# Altium PCB Detection_Circuit_PCB.PcbDoc
Units mil, origin at the board's own origin, x right, y up, seen from the top; angles counter-clockwise.
Board outline 6000 x 2000 mil, 2 copper layers (TOP, BOTTOM), stack 54 mil thick; 173 components, 63 nets, 342 pads, 43 vias.
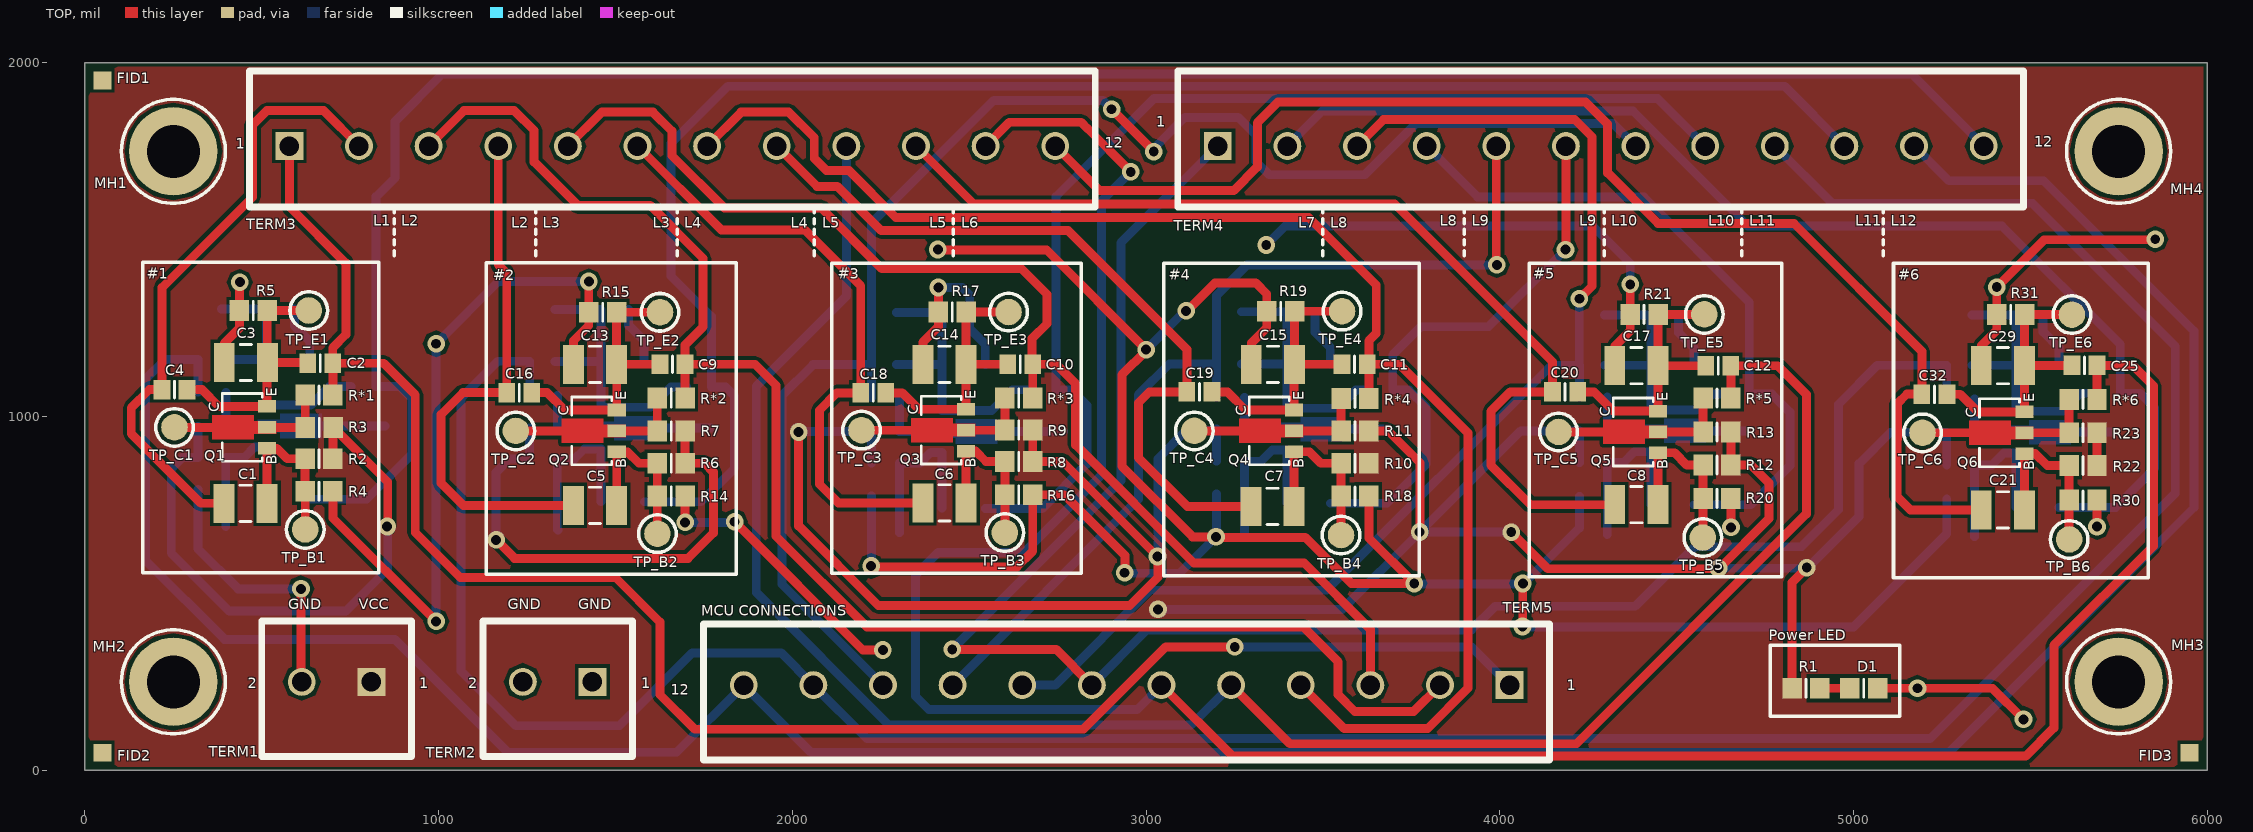
[diagram p0: TOP view]
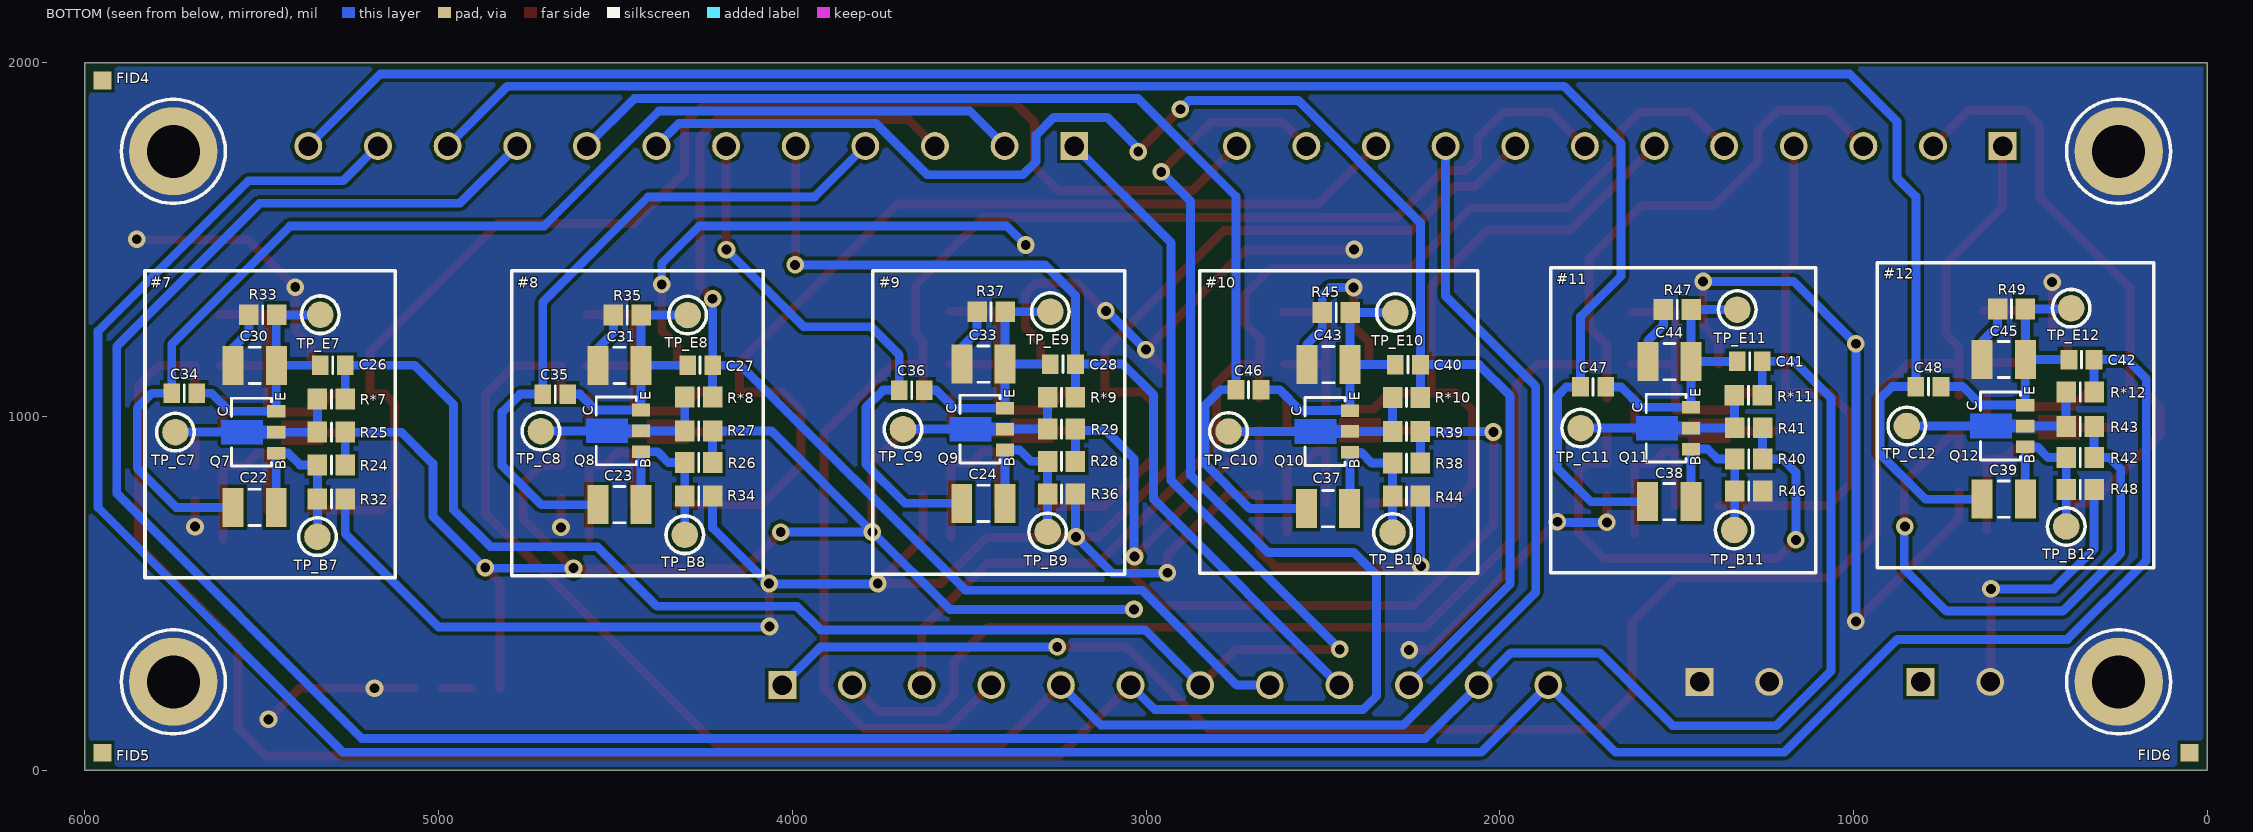
[diagram p1: BOTTOM view, seen from below]

## Layer stack, top to bottom
Top Solder: solder mask 4, Solder Resist, Dk 3.5
TOP: signal copper 20
Dielectric 1: dielectric 14, FR-4, Dk 4.8
BOTTOM: signal copper 20
Bottom Solder: solder mask 4, Solder Resist, Dk 3.5

## Board outline
0,0 6000,0 6000,2000 0,2000

## Design rules (kind name [scope] priority, off if disabled: settings)
BoardOutlineClearance [All] p1: gap=10
Clearance [All] p1: gap=10
HoleSize [All] p1: absolutevalues=TRUE maxlimit=500 minlimit=1 maxpercent=80.000 minpercent=20.000
MinimumSolderMaskSliver [All] p1: minsoldermaskwidth=2
PlaneConnect [All] p1: planeconnectstyle=Direct reliefexpansion=20 reliefentries=4 reliefconductorwidth=10 reliefairgap=10
PolygonConnect [All] p1: connectstyle=Direct reliefconductorwidth=10 reliefentries=4 polygonreliefangle="90 Angle" airgapwidth=10
RoutingVias VCC_Vias [InNet('VCC')] p1: holewidth=28 width=50 viastyle="Through Hole" minholewidth=28 minwidth=50 maxholewidth=28 maxwidth=50
RoutingVias GND_Vias [InNet('GND')] p2: holewidth=28 width=50 viastyle="Through Hole" minholewidth=28 minwidth=50 maxholewidth=28 maxwidth=50
RoutingVias Default_Vias [InNetClass('Default_Class')] p3: holewidth=28 width=50 viastyle="Through Hole" minholewidth=28 minwidth=50 maxholewidth=28 maxwidth=50
SilkToSilkClearance [All] p1: silktosilkclearance=2
SilkToSolderMaskClearance [IsPad] p1: minsilkscreentomaskgap=2 clearancetoexposedcopper=TRUE
SolderMaskExpansion [All] p1: expansion=4
Width VCC_Width [InNet('VCC')] p1: maxlimit=25 minlimit=25 preferedwidth=25
Width GND_Width [InNet('GND')] p2: maxlimit=25 minlimit=25 preferedwidth=25
Width Default_Width [InNetClass('Default_Class')] p3: maxlimit=25 minlimit=25 preferedwidth=25
25 further rules are at their usual default settings.

## Classes and differential pairs
component class Detection_Circuit_Sheet_01: C1 C2 C3 C4 D1 FID1 FID2 FID3 FID4 FID5 FID6 HEX_NUT1 MH1 MH2 MH3 MH4 Q1 R1 R2 R3 R4 R5 R*1 Screw1 StandOff1 StandOff2 StandOff3 StandOff4 TERM1 TERM2 TP_B1 TP_C1 TP_E1 Washer1 Washer2 Washer3 Washer4 Washer5 Washer6 Washer7 Washer8
component class Detection_Circuit_Sheet_02: C5 C6 C7 C8 C9 C10 C11 C12 C13 C14 C15 C16 C17 C18 C19 C20 C21 C22 C23 C24 C25 C26 C27 C28 C29 C30 C31 C32 C33 C34 C35 C36 C37 C38 C39 C40 C41 C42 C43 C44 C45 C46 C47 C48 Q2 Q3 Q4 Q5 Q6 Q7 Q8 Q9 Q10 Q11 Q12 R6 R7 R8 R9 R10 R11 R12 R13 R14 R15 R16 R17 R18 R19 R20 R21 R22 R23 R24 R25 R26 R27 R28 R29 R30 R31 R32 R33 R34 R35 R36 R37 R38 R39 R40 R41 R42 R43 R44 R45 R46 R47 R48 R49 R*2 R*3 R*4 R*5 R*6 R*7 R*8 R*9 R*10 R*11 R*12 TERM3 TERM4 TERM5 TP_B2 TP_B3 TP_B4 TP_B5 TP_B6 TP_B7 TP_B8 TP_B9 TP_B10 TP_B11 TP_B12 TP_C2 TP_C3 TP_C4 TP_C5 TP_C6 TP_C7 TP_C8 TP_C9 TP_C10 TP_C11 TP_C12 TP_E2 TP_E3 TP_E4 TP_E5 TP_E6 TP_E7 TP_E8 TP_E9 TP_E10 TP_E11 TP_E12
net class Default_Class: BASE_1 BASE_2 BASE_3 BASE_4 BASE_5 BASE_6 BASE_7 BASE_8 BASE_9 BASE_10 BASE_11 BASE_12 COLLECTOR_1 COLLECTOR_2 COLLECTOR_3 COLLECTOR_4 COLLECTOR_5 COLLECTOR_6 COLLECTOR_7 COLLECTOR_8 COLLECTOR_9 COLLECTOR_10 COLLECTOR_11 COLLECTOR_12 EMITTER_1 EMITTER_2 EMITTER_3 EMITTER_4 EMITTER_5 EMITTER_6 EMITTER_7 EMITTER_8 EMITTER_9 EMITTER_10 EMITTER_11 EMITTER_12 FEEDBACK_1 FEEDBACK_2 FEEDBACK_3 FEEDBACK_4 FEEDBACK_5 FEEDBACK_6 FEEDBACK_7 FEEDBACK_8 FEEDBACK_9 FEEDBACK_10 FEEDBACK_11 FEEDBACK_12 MCU_1 MCU_2 MCU_3 MCU_4 MCU_5 MCU_6 MCU_7 MCU_8 MCU_9 MCU_10 MCU_11 MCU_12 NetD1_1

## Components (designator, comment, footprint, x,y, rotation, side; value= is the part's Value field where it differs from the comment)
C1 "100UF" C1210_M 454,755 r0 top
C2 "08055C224JAT2A" 6-0805_N 665.34,1151 r0 top
C3 "100UF" C1210_M 455,1153 r0 top
C4 "08055C224JAT2A" 6-0805_N 253.28,1076.59 r0 top
C5 "100UF" C1210_M 1442.37,749 r0 top
C6 "100UF" C1210_M 2430.39,756 r0 top
C7 "100UF" C1210_M 3357.74,746 r0 top
C8 "100UF" C1210_M 4386.37,751 r0 top
C9 "08055C224JAT2A" 6-0805_N 1661.37,1148 r0 top
C10 "08055C224JAT2A" 6-0805_N 2644.39,1148 r0 top
C11 "08055C224JAT2A" 6-0805_N 3589.74,1148 r0 top
C12 "08055C224JAT2A" 6-0805_N 4617.8,1144 r0 top
C13 "100UF" C1210_M 1442.37,1148 r0 top
C14 "100UF" C1210_M 2430.39,1148 r0 top
C15 "100UF" C1210_M 3358.74,1148 r0 top
C16 "08055C224JAT2A" 6-0805_N 1228,1068 r0 top
C17 "100UF" C1210_M 4386.37,1144 r0 top
C18 "08055C224JAT2A" 6-0805_N 2229,1067 r0 top
C19 "08055C224JAT2A" 6-0805_N 3151,1070 r0 top
C20 "08055C224JAT2A" 6-0805_N 4185,1070 r0 top
C21 "100UF" C1210_M 5422.65,736.28 r0 top
C22 "100UF" C1210_M 5520.11,743.4 r180 bottom
C23 "100UF" C1210_M 4488.57,751 r180 bottom
C24 "100UF" C1210_M 3460,755 r180 bottom
C25 "08055C224JAT2A" 6-0805_N 5653.37,1144.69 r0 top
C26 "08055C224JAT2A" 6-0805_N 5299.11,1145 r180 bottom
C27 "08055C224JAT2A" 6-0805_N 4260.57,1145.38 r180 bottom
C28 "08055C224JAT2A" 6-0805_N 3235,1148.6 r180 bottom
C29 "100UF" C1210_M 5422.65,1144.28 r0 top
C30 "100UF" C1210_M 5519.83,1145 r180 bottom
C31 "100UF" C1210_M 4488.57,1145 r180 bottom
C32 "08055C224JAT2A" 6-0805_N 5229,1063 r0 top
C33 "100UF" C1210_M 3459.72,1148.6 r180 bottom
C34 "08055C224JAT2A" 6-0805_N 5719,1066 r180 bottom
C35 "08055C224JAT2A" 6-0805_N 4670.28,1063.6 r180 bottom
C36 "08055C224JAT2A" 6-0805_N 3662,1075 r180 bottom
C37 "100UF" C1210_M 2485.31,740 r180 bottom
C38 "100UF" C1210_M 1520.57,759.4 r180 bottom
C39 "100UF" C1210_M 574.88,766.4 r180 bottom
C40 "08055C224JAT2A" 6-0805_N 2259.6,1147 r180 bottom
C41 "08055C224JAT2A" 6-0805_N 1292.88,1156.4 r180 bottom
C42 "08055C224JAT2A" 6-0805_N 354.88,1161.4 r180 bottom
C43 "100UF" C1210_M 2484.31,1147 r180 bottom
C44 "100UF" C1210_M 1519.88,1155.4 r180 bottom
C45 "100UF" C1210_M 574.88,1161.4 r180 bottom
C46 "08055C224JAT2A" 6-0805_N 2710,1076 r180 bottom
C47 "08055C224JAT2A" 6-0805_N 1736,1084 r180 bottom
C48 "08055C224JAT2A" 6-0805_N 788,1085 r180 bottom
D1 "LTST-C171GKT" 6-0805_M 5029,232 r0 top
FID1 "Fiducial" Fiducial#1 52,1951 r90 top
FID2 "Fiducial" Fiducial#2 -246,158 r90 top
FID3 "Fiducial" Fiducial#3 5953,55 r90 top
FID4 "Fiducial" Fiducial#4 5948,1950 r90 bottom
FID5 "Fiducial" Fiducial#5 5969,99 r90 bottom
FID6 "Fiducial" Fiducial#6 -110,51 r90 bottom
MH1 "#6 MH" #6_MH 250,1750 r0 top locked
MH2 "#6 MH" #6_MH 250,250 r0 top locked
MH3 "#6 MH" #6_MH 5750,250 r0 top locked
MH4 "#6 MH" #6_MH 5750,1750 r0 top locked
Q1 "DXT3904" DXT3904-13 445.28,969.6 r90 top
Q2 "DXT3904" DXT3904-13 1433.65,959.6 r90 top
Q3 "DXT3904" DXT3904-13 2421.68,961.6 r90 top
Q4 "DXT3904" DXT3904-13 3349.02,959.6 r90 top
Q5 "DXT3904" DXT3904-13 4377.96,956.69 r90 top
Q6 "DXT3904" DXT3904-13 5413.65,954.28 r90 top
Q7 "DXT3904" DXT3904-13 5528.83,956 r90 bottom
Q8 "DXT3904" DXT3904-13 4497.28,959.6 r90 bottom
Q9 "DXT3904" DXT3904-13 3468.72,964.6 r90 bottom
Q10 "DXT3904" DXT3904-13 2493.31,958 r90 bottom
Q11 "DXT3904" DXT3904-13 1528.88,967.4 r90 bottom
Q12 "DXT3904" DXT3904-13 583.88,973.4 r90 bottom
R1 "1K" 6-0805_M 4866,232 r180 top
R2 "39K" 6-0805_M 662,881 r0 top
R3 "2.2K" 6-0805_M 662.28,969.54 r0 top
R4 "10K" 6-0805_M 662,789 r180 top
R5 "470" 6-0805_M 476,1300 r0 top
R6 "39K" 6-0805_M 1657.65,868 r0 top
R7 "2.2K" 6-0805_M 1657.65,959.54 r0 top
R8 "39K" 6-0805_M 2640.39,873 r0 top
R9 "2.2K" 6-0805_M 2640.39,961.6 r0 top
R10 "39K" 6-0805_M 3590.74,868 r0 top
R11 "2.2K" 6-0805_M 3590.74,959.6 r0 top
R12 "39K" 6-0805_M 4614.37,863 r0 top
R13 "2.2K" 6-0805_M 4614.37,956.64 r0 top
R14 "10K" 6-0805_M 1657.65,776 r180 top
R15 "470" 6-0805_M 1464.02,1295 r0 top
R16 "10K" 6-0805_M 2640.39,779 r180 top
R17 "470" 6-0805_M 2452.39,1296 r0 top
R18 "10K" 6-0805_M 3590.74,775 r180 top
R19 "470" 6-0805_M 3380.72,1298 r0 top
R20 "10K" 6-0805_M 4614.37,769 r180 top
R21 "470" 6-0805_M 4408.37,1289 r0 top
R22 "39K" 6-0805_M 5649.37,861.69 r0 top
R23 "2.2K" 6-0805_M 5649.37,954.23 r0 top
R24 "39K" 6-0805_M 5303.11,863.4 r180 bottom
R25 "2.2K" 6-0805_M 5303.11,955.94 r180 bottom
R26 "39K" 6-0805_M 4264.57,870 r180 bottom
R27 "2.2K" 6-0805_M 4264.57,959.54 r180 bottom
R28 "39K" 6-0805_M 3238.72,873.6 r180 bottom
R29 "2.2K" 6-0805_M 3238.72,964.54 r180 bottom
R30 "10K" 6-0805_M 5649.37,763.69 r180 top
R31 "470" 6-0805_M 5444.65,1288.28 r0 top
R32 "10K" 6-0805_M 5303.11,767.4 r0 bottom
R33 "470" 6-0805_M 5497.13,1288 r180 bottom
R34 "10K" 6-0805_M 4264.57,775 r0 bottom
R35 "470" 6-0805_M 4466.57,1287 r180 bottom
R36 "10K" 6-0805_M 3239,781 r0 bottom
R37 "470" 6-0805_M 3438,1296.6 r180 bottom
R38 "39K" 6-0805_M 2263.6,868.4 r180 bottom
R39 "2.2K" 6-0805_M 2263.6,958 r180 bottom
R40 "39K" 6-0805_M 1296,880 r180 bottom
R41 "2.2K" 6-0805_M 1295.88,968.4 r180 bottom
R42 "39K" 6-0805_M 358.88,884.4 r180 bottom
R43 "2.2K" 6-0805_M 358.88,972.5 r180 bottom
R44 "10K" 6-0805_M 2263.6,775.4 r0 bottom
R45 "470" 6-0805_M 2462.31,1294 r180 bottom
R46 "10K" 6-0805_M 1296,790 r0 bottom
R47 "470" 6-0805_M 1497.88,1302.4 r180 bottom
R48 "10K" 6-0805_M 358.88,794.4 r0 bottom
R49 "470" 6-0805_M 552.88,1304.59 r180 bottom
R*1 "0" 6-0805_M 662,1061 r0 top
R*2 "0" 6-0805_M 1657.65,1053 r0 top
R*3 "0" 6-0805_M 2640.39,1053 r0 top
R*4 "0" 6-0805_M 3590.74,1051 r0 top
R*5 "0" 6-0805_M 4614.37,1052.69 r0 top
R*6 "0" 6-0805_M 5649.37,1048.69 r0 top
R*7 "0" 6-0805_M 5303.11,1049.4 r180 bottom
R*8 "0" 6-0805_M 4264.57,1055 r180 bottom
R*9 "0" 6-0805_M 3238.72,1054.6 r180 bottom
R*10 "0" 6-0805_M 2263.6,1054.4 r180 bottom
R*11 "0" 6-0805_M 1296.88,1060.4 r180 bottom
R*12 "0" 6-0805_M 358.88,1069.4 r180 bottom
TERM1 "1935161" 1935161 810,250 r0 top
TERM2 "1935161" 1935161 1435,250 r0 top
TERM3 "1935268" 1935268 578,1765 r180 top locked
TERM4 "1935268" 1935268 3203,1765 r180 top locked
TERM5 "1935268" 1935268 4028,241 r0 top locked
TP_B1 "TestPoint" TestPoint 623,681 r90 top
TP_B2 "TestPoint" TestPoint 1618.68,669 r90 top
TP_B3 "TestPoint" TestPoint 2601.02,672 r90 top
TP_B4 "TestPoint" TestPoint 3551.37,665 r90 top
TP_B5 "TestPoint" TestPoint 4574.37,658 r90 top
TP_B6 "TestPoint" TestPoint 5610,652.69 r90 top
TP_B7 "TestPoint" TestPoint 5342.48,660.4 r90 bottom
TP_B8 "TestPoint" TestPoint 4303.94,666 r90 bottom
TP_B9 "TestPoint" TestPoint 3278.09,674 r90 bottom
TP_B10 "TestPoint" TestPoint 2302.88,672.4 r90 bottom
TP_B11 "TestPoint" TestPoint 1337.25,679.4 r90 bottom
TP_B12 "TestPoint" TestPoint 398.25,689.4 r90 bottom
TP_C1 "TestPoint" TestPoint 253.28,969.6 r90 top
TP_C2 "TestPoint" TestPoint 1218.37,959.54 r90 top
TP_C3 "TestPoint" TestPoint 2195.68,961.6 r90 top
TP_C4 "TestPoint" TestPoint 3136.74,959.6 r90 top
TP_C5 "TestPoint" TestPoint 4166.37,956.64 r90 top
TP_C6 "TestPoint" TestPoint 5195.37,954.23 r90 top
TP_C7 "TestPoint" TestPoint 5744.11,956 r90 bottom
TP_C8 "TestPoint" TestPoint 4710.57,959 r90 bottom
TP_C9 "TestPoint" TestPoint 3687,964.54 r90 bottom
TP_C10 "TestPoint" TestPoint 2766.6,958 r90 bottom
TP_C11 "TestPoint" TestPoint 1770.88,967.4 r90 bottom
TP_C12 "TestPoint" TestPoint 848.88,973.4 r90 bottom
TP_E1 "TestPoint" TestPoint 633,1300 r90 top
TP_E2 "TestPoint" TestPoint 1625.94,1295 r90 top
TP_E3 "TestPoint" TestPoint 2611.39,1295.6 r90 top
TP_E4 "TestPoint" TestPoint 3554.31,1298 r90 top
TP_E5 "TestPoint" TestPoint 4578.71,1289 r90 top
TP_E6 "TestPoint" TestPoint 5617.94,1288.28 r90 top
TP_E7 "TestPoint" TestPoint 5334.54,1288 r90 bottom
TP_E8 "TestPoint" TestPoint 4296,1287 r90 bottom
TP_E9 "TestPoint" TestPoint 3270.43,1296.6 r90 bottom
TP_E10 "TestPoint" TestPoint 2295.03,1294 r90 bottom
TP_E11 "TestPoint" TestPoint 1328.31,1302.4 r90 bottom
TP_E12 "TestPoint" TestPoint 384.31,1306.4 r90 bottom

## Footprints (in the part's own frame and the unit in brackets; to place one, negate y for a bottom-side part, rotate by r counter-clockwise, add the part's x,y. Pads: shape width x height; smd on the part's side, far side on the other; paste and mask are expansions set on the pad)
6-0805_M [mm] "Chip Resistor, Body 2.0x1.2mm, IPC Low Density"
  rect 1.4x1.5 smd: 1(-1,0) 2(1,0)
  silkscreen extent 0,-0.65 0,0.65, body extent -1.07,-0.7 1.07,0.7, height 0.7
6-0805_N [mm] "Chip Resistor, Body 2.0x1.2mm, IPC Medium Density"
  rect 1.2x1.4 smd: 1(-0.9,0) 2(0.9,0)
  silkscreen extent 0,-0.6 0,0.6, body extent -1.07,-0.7 1.07,0.7, height 0.7
1935161 [mm] "TERM BLOCK PCB 2POS 5.0MM GREEN"
  rect 2x2 hole 1.4: 1(0,0)
  round 2 hole 1.4: 2(-5,0)
  silkscreen extent -7.88,-5.38 2.88,4.38, body extent -7.5,-5 2.5,4, height 11.4
1935268 [mm] "TERM BLOCK PCB 12POS 5.0MM GREEN"
  rect 2x2 hole 1.4: 1(0,0)
  round 2 hole 1.4: 2(-5,0) 3(-10,0) 4(-15,0) 5(-20,0) 6(-25,0) 7(-30,0) 8(-35,0) 9(-40,0) 10(-45,0) 11(-50,0) 12(-55,0)
  silkscreen extent -57.87,-5.38 2.88,4.38, body extent -57.5,-5 2.5,4, height 11.4
#6_MH [mil] "#6 Mounting Hole w/ 6-32 Hex Stand Off Clearance"
  round 250 hole 150: MH(0,0)
  silkscreen extent -147,-147 147,147
C1210_M [mm] "Chip Capacitor, Body 3.2x2.5mm, IPC Low Density"
  rect 1.5x2.8 smd: 1(-1.55,0) 2(1.55,0)
  silkscreen extent -0.4,-1.3 0.4,1.3, body extent -1.7,-1.35 1.7,1.35, height 1.5
DXT3904-13 [mm] "TRANS NPN 40V 0.2A SOT89-3"
  rect 0.9x1.3 smd: 1(-0.001,-1.775) 2(-1.5,-1.775) 3(1.5,-1.775)
  TOP region: -0.866,-0.805 -0.45,-0.805 -0.45,-2.425 0.45,-2.425 0.45,-0.805 0.866,-0.805 0.866,2.175 -0.866,2.175
  silkscreen extent -2.44,-1.42 2.44,1.45, body extent -2.3,-1.3 2.3,1.3, height 1.6
Fiducial#1 [mil] "25 MIL FIDUCIAL"
  rect 50x50 smd mask+0: 1(-1,2)
Fiducial#2 [mil] "25 MIL FIDUCIAL"
  rect 50x50 smd mask+0: 1(-108,-296)
Fiducial#3 [mil] "25 MIL FIDUCIAL"
  rect 50x50 smd mask+0: 1(-5,3)
Fiducial#4 [mil] "25 MIL FIDUCIAL"
  rect 50x50 smd mask+0: 1(0,2)
Fiducial#5 [mil] "25 MIL FIDUCIAL"
  rect 50x50 smd mask+0: 1(-49,-19)
Fiducial#6 [mil] "25 MIL FIDUCIAL"
  rect 50x50 smd mask+0: 1(-1,160)
TestPoint [mil] "TestPoint"
  round 75 smd mask+10: 1(0,0)
  silkscreen extent -53,-53 53,53

## Part data
C1 C3 C5 C6 C7 C8 C13 C14 C15 C17 C21 C22 C23 C24 C29 C30 C31 C33 C37 C38 C39 C43 C44 C45: library part CC1210MKX5R7BB107, "CAP CER 100UF 16V X5R 1210"
C2 C4 C9 C10 C11 C12 C16 C18 C19 C20 C25 C26 C27 C28 C32 C34 C35 C36 C40 C41 C42 C46 C47 C48: "CAP CER 0.22UF 50V X7R 0805"
D1: library part LED3, "LED GREEN CLEAR 0805 SMD"
MH1 MH2 MH3 MH4: library part MH, "#6 Mounting Hole"
Q1 Q2 Q3 Q4 Q5 Q6 Q7 Q8 Q9 Q10 Q11 Q12: library part DXT3904-13, "TRANS NPN 40V 0.2A SOT89-3"
R1: library part RNCP0805FTD1K00, "RES SMD 1K OHM 1% 1/4W 0805"
R2 R6 R8 R10 R12 R22 R24 R26 R28 R38 R40 R42: library part ERJ-PB6D3902V, "RES SMD 39K OHM 0.5% 1/4W 0805"
R3 R7 R9 R11 R13 R23 R25 R27 R29 R39 R41 R43: library part ERJ-PB6D2201V, "RES SMD 2.2K OHM 0.5% 1/4W 0805"
R4 R14 R16 R18 R20 R30 R32 R34 R36 R44 R46 R48: library part RNCP0805FTD10K0, "RES SMD 10K OHM 1% 1/4W 0805"
R5 R15 R17 R19 R21 R31 R33 R35 R37 R45 R47 R49: library part ERJ-PB6D4700V, "RES SMD 470 OHM 0.5% 1/4W 0805"
R*1 R*2 R*3 R*4 R*5 R*6 R*7 R*8 R*9 R*10 R*11 R*12: library part ERJ-6GEY0R00V, "RES SMD 0 OHM JUMPER 1/8W 0805"
TERM1 TERM2: "TERM BLOCK PCB 2POS 5.0MM GREEN"
TERM3 TERM4 TERM5: "TERM BLOCK PCB 12POS 5.0MM GREEN"
TP_B1 TP_B2 TP_B3 TP_B4 TP_B5 TP_B6 TP_B7 TP_B8 TP_B9 TP_B10 TP_B11 TP_B12 TP_C1 TP_C2 TP_C3 TP_C4 TP_C5 TP_C6 TP_C7 TP_C8 TP_C9 TP_C10 TP_C11 TP_C12 TP_E1 TP_E2 TP_E3 TP_E4 TP_E5 TP_E6 TP_E7 TP_E8 TP_E9 TP_E10 TP_E11 TP_E12: "Test Point"

## Via types
v1: diameter 50, hole 28, TOP to BOTTOM, 43 vias

## Nets (pads, with @x,y where several pads share a name; then routed paths per layer and width w, separated by ;. In a path a pad name is that pad's centre, name@x,y a point inside that pad or via, vN(x,y) a via of type N, cw(c..) or ccw(c..) an arc to the next point about the centre after c; other vN are vias at no path point)
BASE_1: C1.2 Q1.2 R2.1 R4.2 TP_B1.1 | length 474.7
  TOP w25: C1.2@515.17,755.14 Q1.2 542.46,910.54 572,881 R2.1 R4.2 ; TP_B1.1 R4.2@623,788.63
BASE_2: C5.2 Q2.2 R6.1 R14.2 TP_B2.1 | length 478.2
  TOP w25: C5.2@1503.54,749.14 Q2.2 1533.91,900.54 1566.45,868 R6.1 R14.2 TP_B2.1@1618.28,669.39
BASE_3: C6.2 Q3.2 R8.1 R16.2 TP_B3.1 | length 469.1
  TOP w25: C6.2@2491.56,756.14 Q3.2 2518.15,902.54 2547.69,873 R8.1 R16.2 TP_B3.1
BASE_4: C7.2 Q4.2 R10.1 R18.2 TP_B4.1 | length 508.3
  TOP w25: C7.2@3418.91,746.14 Q4.2 3461.96,900.54 3494.5,868 R10.1 R18.2 TP_B4.1 TP_B4.1@3551.37,660.06
BASE_5: C8.2 Q5.2 R12.1 R20.2 TP_B5.1 | length 492.1
  TOP w25: C8.2@4447.84,751.45 Q5.2 4494.36,897.64 4529,863 R12.1 R20.2 TP_B5.1@4575,658.63
BASE_6: C21.2 Q6.2 R22.1 R30.2 TP_B6.1 | length 508.2
  TOP w25: C21.2@5483.54,736.43 Q6.2 5514.37,895.23 5547.91,861.69 R22.1 R30.2 TP_B6.1
BASE_7: C22.2 Q7.2 R24.1 R32.2 TP_B7.1 | length 486.8
  BOTTOM w25: TP_B7.1 R32.2 R24.1 5391.95,863.4 5425.5,896.94 Q7.2 C22.2@5458.95,743.54
BASE_8: C23.2 Q8.2 R26.1 R34.2 TP_B8.1 | length 489.5
  BOTTOM w25: TP_B8.1 R34.2 R26.1 4349.95,870 4380.5,900.54 Q8.2 C23.2@4427.4,751.14
BASE_9: C24.2 Q9.2 R28.1 R36.2 TP_B9.1 | length 484
  BOTTOM w25: TP_B9.1 R28.1 3325.2,873.6 3357.14,905.54 Q9.2 C24.2@3398.83,755.14
BASE_10: C37.2 Q10.2 R38.1 R44.2 TP_B10.1 | length 487.1
  BOTTOM w25: TP_B10.1@2302.97,672.49 R44.2 R38.1 2361.4,868.4 2391.94,898.94 Q10.2 C37.2@2423.43,740.86
BASE_11: C38.2 Q11.2 R40.1 R46.2 TP_B11.1 | length 485.1
  BOTTOM w25: TP_B11.1 1335.37,681.28 R46.2 R40.1 1384,880 1412.35,908.35 Q11.2 C38.2@1459,759.95
BASE_12: C39.2 Q12.2 R42.1 R48.2 TP_B12.1 | length 471
  BOTTOM w25: TP_B12.1 R48.2 R42.1 450.64,884.4 480.58,914.35 Q12.2 C39.2@514,766.54
COLLECTOR_1: Q1.1 R3.1 R*1.1 TP_C1.1 | length 339.7
  TOP w25: TP_C1.1 394.1,969.6 ; Q1.1 R3.1 R*1.1@622.91,1060.72
COLLECTOR_2: Q2.1 R7.1 R*2.1 TP_C2.1 | length 372.3
  TOP w25: TP_C2.1 1382.42,959.54 ; Q2.1 R7.1 R*2.1
COLLECTOR_3: Q3.1 R9.1 R*3.1 TP_C3.1 | length 375.6
  TOP w25: TP_C3.1 2370.5,961.6 ; Q3.1 2600.97,961.54 R*3.1@2600.97,1052.94
COLLECTOR_4: Q4.1 R11.1 R*4.1 TP_C4.1 | length 385
  TOP w25: TP_C4.1 3297.84,959.6 ; Q4.1 3551.32,959.54 R11.1 R*4.1
COLLECTOR_5: Q5.1 R13.1 R*5.1 TP_C5.1 | length 383.6
  TOP w25: TP_C5.1 4326.72,956.64 ; Q5.1 R13.1 R*5.1
COLLECTOR_6: Q6.1 R23.1 R*6.1 TP_C6.1 | length 388
  TOP w25: TP_C6.1 5362.42,954.23 ; Q6.1 R23.1 R*6.1
COLLECTOR_7: Q7.1 R25.1 R*7.1 TP_C7.1 | length 374
  BOTTOM w25: R*7.1 R25.1 Q7.1 ; 5580.01,956 TP_C7.1
COLLECTOR_8: Q8.1 R27.1 R*8.1 TP_C8.1 | length 380.4
  BOTTOM w25: R*8.1 R27.1 Q8.1 ; 4549.06,959 TP_C8.1
COLLECTOR_9: Q9.1 R29.1 R*9.1 TP_C9.1 | length 377.9
  BOTTOM w25: R*9.1 R29.1 Q9.1 ; 3519.95,964.54 TP_C9.1
COLLECTOR_10: Q10.1 R39.1 R*10.1 TP_C10.1 | length 444.5
  BOTTOM w25: R*10.1 R39.1 2303.02,957.94 Q10.1 ; 2539,958 TP_C10.1
COLLECTOR_11: Q11.1 R41.1 R*11.1 TP_C11.1 | length 406.5
  BOTTOM w25: R*11.1@1336.31,1060.35 1336.31,967.35 Q11.1 ; 1580.06,967.4 TP_C11.1
COLLECTOR_12: Q12.1 R43.1 R*12.1 TP_C12.1 | length 423.9
  BOTTOM w25: R*12.1@399.1,1068.55 399.1,973.35 Q12.1 ; 635.06,973.4 TP_C12.1
EMITTER_1: C2.1 C3.2 C4.2 Q1.3 R5.2 TP_E1.1 | length 719.4
  TOP w25: 316.43,1077 330.6,1077 378.94,1028.65 Q1.3 C3.2@515.17,1153.45 ; C3.2@515.37,1153.65 R5.2 TP_E1.1 ; C3.2 C2.1@627.91,1153
EMITTER_2: C9.1 C13.2 C16.2 Q2.3 R15.2 TP_E2.1 | length 781.8
  TOP w25: C16.2 1307,1068 1356.35,1018.65 Q2.3 C13.2@1503.54,1147.86 ; C9.1 C13.2 R15.2 TP_E2.1
EMITTER_3: C10.1 C14.2 C18.2 Q3.3 R17.2 TP_E3.1 | length 758.6
  TOP w25: C18.2 2311,1067 2357.35,1020.65 Q3.3 ; Q3.3@2491.42,1020.8 C14.2 ; C10.1 C14.2 ; TP_E3.1@2611.34,1295.65 2491.42,1295.65 C14.2
EMITTER_4: C11.1 C15.2 C19.2 Q4.3 R19.2 TP_E4.1 | length 801.1
  TOP w25: C19.2 3230,1070 3281.35,1018.65 Q4.3 C15.2@3418.91,1147.14 ; C11.1 C15.2 3419.76,1297.68 R19.2 TP_E4.1
EMITTER_5: C12.1 C17.2 C20.2 Q5.3 R21.2 TP_E5.1 | length 788.8
  TOP w25: C20.2 4266.6,1070 4320.85,1015.75 Q5.3 C17.2@4447.84,1144 ; C17.2 C17.2@4447.84,1144 ; TP_E5.1@4578.61,1288.9 4447.84,1288.9 C17.2@4447.84,1144 ; C12.1 C17.2@4447.84,1144
EMITTER_6: C25.1 C29.2 C32.2 Q6.3 R31.2 TP_E6.1 | length 782.4
  TOP w25: C32.2 5302,1063 5351.66,1013.34 Q6.3 5483.54,1144.14 C25.1@5617.39,1144.14 ; C29.2 5483.68,1287.94 R31.2 TP_E6.1
EMITTER_7: C26.1 C30.2 C34.2 Q7.3 R33.2 TP_E7.1 | length 765
  BOTTOM w25: C26.1 C30.2 ; TP_E7.1@5335.72,1286.82 5458.95,1286.82 Q7.3 5591.06,1015.06 5642,1066 C34.2
EMITTER_8: C27.1 C31.2 C35.2 Q8.3 R35.2 TP_E8.1 | length 756.9
  BOTTOM w25: TP_E8.1 R35.2 4427.4,1286.8 C31.2@4427.4,1145 ; C27.1@4296.38,1145 C31.2@4427.4,1145 ; C31.2 C31.2@4427.4,1145 ; C35.2 4600.6,1063.6 4555.65,1018.65 Q8.3 C31.2@4427.4,1145
EMITTER_9: C28.1 C33.2 C36.2 Q9.3 R37.2 TP_E9.1 | length 778.2
  BOTTOM w25: C28.1 C33.2 Q9.3@3398.69,1023.8 ; TP_E9.1 R37.2 C33.2@3398.63,1148.66 ; Q9.3 3541.65,1023.65 3593,1075 C36.2
EMITTER_10: C40.1 C43.2 C46.2 Q10.3 R45.2 TP_E10.1 | length 808.3
  BOTTOM w25: C40.1 C43.2@2423.43,1147 ; TP_E10.1 R45.2 ; R45.2@2423.43,1293.51 Q10.3 2563.06,1017.06 2622,1076 C46.2
EMITTER_11: C41.1 C44.2 C47.2 Q11.3 R47.2 TP_E11.1 | length 801.3
  BOTTOM w25: TP_E11.1 R47.2 1458.86,1302.06 C44.2 ; C41.1@1329.31,1155.4 C44.2 ; C47.2 1657,1084 1599.46,1026.46 Q11.3 1459,1155.26 C44.2
EMITTER_12: C42.1 C45.2 C48.2 Q12.3 R49.2 TP_E12.1 | length 783.1
  BOTTOM w25: TP_E12.1@386.47,1304.24 513.86,1304.24 C45.2 ; C42.1 C45.2 ; C48.2 691,1085 638.46,1032.46 Q12.3 514,1161.26 C45.2
FEEDBACK_1: C1.1 C4.1 TERM3.2 | length 1738.1
  TOP w25: C1.1 328,755 131,952 131,1025 182.59,1076.59 C4.1 217.85,1364.85 474,1621 474,1825 514,1865 674.85,1865 TERM3.2
FEEDBACK_2: C5.1 C16.1 TERM3.4 | length 1512.8
  TOP w25: TERM3.4 1168.55,1429.45 1192.57,1405.43 C16.1 1069,1068 1007,1006 1007,811.69 1069.69,749 C5.1
FEEDBACK_3: C6.1 C18.1 TERM3.6 | length 1758
  TOP w25: TERM3.6 1799.25,1528 2035,1528 2193.57,1369.43 C18.1 2126,1067 2077,1018 2077,808.69 2129.69,756 C6.1
FEEDBACK_4: C7.1 C19.1 TERM3.8 | length 2198.1
  TOP w25: TERM3.8 2069.95,1651 2127,1651 2252,1526 2780,1526 3115.57,1190.43 C19.1 3010,1070 2978.5,1038.5 2978.5,883.91 3116.41,746 C7.1
FEEDBACK_5: C8.1 C20.1 TERM3.10 | length 2883.2
  TOP w25: TERM3.10 2513.65,1601 3703,1601 4149.57,1154.43 C20.1 4030.17,1070 3975,1014.83 3975,863 4087,751 C8.1
FEEDBACK_6: C21.1 C32.1 TERM3.12 | length 3770.5
  TOP w25: TERM3.12 2869.35,1639 3248,1639 3315,1706 3315,1831 3373,1889 4243,1889 4305,1827 4305,1689 4448,1546 4832,1546 5193.57,1184.43 C32.1 ; C32.1@5193.57,1064 5151.65,1064 5124.5,1036.85 5124.5,936.73 5124,936.23 5124,773 5160.72,736.28 C21.1
FEEDBACK_7: C22.1 C34.1 TERM4.2 | length 3409.3
  BOTTOM w25: TERM4.2 3498.85,1864 4377,1864 4702,1539 5420,1539 5754.43,1204.57 C34.1 5810.6,1066 5852,1024.6 5852,854 5741.4,743.4 C22.1
FEEDBACK_8: C23.1 C35.1 TERM4.4 | length 1958.3
  BOTTOM w25: TERM4.4 3937.55,1621 4408,1621 4705.72,1323.28 C35.1 4769.4,1063.6 4820.46,1012.54 4820.46,861.6 4709.86,751 C23.1
FEEDBACK_9: C24.1 C36.1 TERM4.6 | length 1595.1
  TOP w25: v1@4187.25,1473.25 TERM4.6
  BOTTOM w25: C24.1 3681.29,755 3791.89,865.6 3791.89,1026.51 3743.4,1075 C36.1 3697.43,1174.43 3777,1254 3968,1254 v1(4186,1472)
FEEDBACK_10: C37.1 C46.1 TERM4.8 | length 3162.4
  BOTTOM w25: C37.1 2706.61,740 2833,866.39 2833,1032 2789,1076 C46.1 2745.43,1622.43 3022,1899 4446.95,1899 TERM4.8
FEEDBACK_11: C38.1 C47.1 TERM4.10 | length 4765.4
  BOTTOM w25: C38.1 1741.87,759.4 1837,854.54 1837,1058 1811,1084 C47.1 1771.43,1282.57 1657,1397 1657,1773 1818,1934 4805.65,1934 TERM4.10
FEEDBACK_12: C39.1 C48.1 TERM4.12 | length 6016.8
  BOTTOM w25: C39.1 796.17,766.4 925,895.23 925,1050 890,1085 C48.1 823.43,1622 877,1675.57 877,1835 1011,1969 5164.35,1969 TERM4.12
GND: C3.1 C13.1 C14.1 C15.1 C17.1 C29.1 C30.1 C31.1 C33.1 C43.1 C44.1 C45.1 D1.2 MH1.MH MH2.MH MH3.MH MH4.MH R4.1 R5.1 R14.1 R15.1 R16.1 R17.1 R18.1 R19.1 R20.1 R21.1 R30.1 R31.1 R32.1 R33.1 R34.1 R35.1 R36.1 R37.1 R44.1 R45.1 R46.1 R47.1 R48.1 R49.1 TERM1.2 TERM2.1 TERM2.2 | length 14686.1
  TOP w25: C3.1 393.98,1207.35 436.63,1250 R5.1 v1@436.63,1378.63 ; v1(610.85,513) 610.85,252.3 TERM1.2 ; R4.1 701.37,712.63 v1(993,421) ; C13.1 1381.35,1214.35 1424.65,1257.65 R15.1 v1(1424.65,1382) ; v1(1697.02,701) R14.1 ; v1@1838.37,701.37 2199.74,340 v1(2256,340) ; v1@2224.23,575 2635,575 2679.76,619.76 R16.1 2769,779 2941,607 v1@2941,559 ; C14.1 2369.37,1210.37 2413.02,1254.02 R17.1 v1(2413.02,1365) ; v1@2413.02,1471 2719,1471 v1(3000.54,1189.46) ; v1@3002,1188 2932,1118 2932,860 3131.91,660.09 v1(3197.89,660.09) ; v1@3115,1297.68 3195.32,1378 3310,1378 3341.35,1346.65 R19.1 3341.35,1251.35 3297.72,1207.72 C15.1 ; v1@3199.35,658.63 3450.37,658.63 3580.7,528.3 v1(3758.54,528.3) 3630.11,656.74 R18.1 ; v1@4065.39,407.3 v1(4065.39,528.3) ; C17.1 4325.35,1199.35 4369,1243 R21.1 v1(4369,1374) ; v1@4653.74,687.26 R20.1 ; D1.2 v1(5181,232) 5393,232 v1(5481,144) ; C29.1 5361.63,1200.63 5405.28,1244.28 R31.1 v1(5405.28,1366) 5539.28,1500 v1@5855,1500 ; v1(5688.74,689) R30.1
  BOTTOM w25: R48.1 319.51,626.49 433,513 v1(610.85,513) ; R49.1 592.25,1256.75 635.91,1213.09 C45.1 ; v1(993,421) v1(993,1206) 1169,1382 v1(1424.65,1382) ; R47.1 1537.25,1257.75 1580.91,1214.09 C44.1 ; v1(1697.02,701) v1@1835.09,701 ; v1@2224.23,576.23 R44.1 ; v1(2413.02,1365) 2480,1365 2501.68,1343.32 R45.1 2501.68,1248.32 2545.34,1204.66 C43.1 ; v1@2941,556.96 3094.76,556.96 v1(3197.89,660.09) ; v1(3000.54,1189.46) v1@3110.22,1299.13 ; v1@3199.63,660.09 R36.1 ; v1(3339.89,1485.11) 3393.78,1539 4263,1539 4369,1433 v1(4369,1374) ; R37.1 3477.37,1239.63 3520.74,1196.26 C33.1 ; v1@3760,526.85 4066.85,526.85 4225.2,685.2 R34.1 ; v1@4066,405 5000,405 5263.74,668.74 R32.1 ; R35.1 4505.94,1237.06 4549.59,1193.41 C31.1 ; R33.1 5536.5,1239.5 5580.85,1195.15 C30.1
  other v1: 4064.54,406.46 2939.54,558.41 2222.77,577.68 4654,687 1836.91,702.82 3113.54,1299.13 438,1380 2411.57,1472.46 5853.54,1501.46
MCU_1: C2.2 R*1.2 TERM3.1 TERM5.1 | length 5049
  TOP w25: TERM3.1 578,1594 738,1434 738,1232 700.77,1194.77 C2.2 845,1151 934,1062 934,672.28 1061.28,545 1500,545 1625.94,419.06 1625.94,214.06 1724,116 2823,116 3056,349 v1(3251,349) ; R*1.2 C2.2@701.37,1150.4 ; TERM5.1 TERM5.1@4041,254
  BOTTOM w25: v1(3251,349) 3920,349 TERM5.1
MCU_2: C9.2 R*2.2 TERM3.3 TERM5.2 | length 4334.4
  TOP w25: TERM3.3 1071.7,1865 1214,1865 1270,1809 1270,1720 1393,1597 1598,1597 1748,1447 1748,1254 1696.8,1202.8 C9.2 1894.41,1148 1954,1088.41 1954,662 2211.54,404.46 3445.54,404.46 3543,307 3543,214 3591,166 3756.15,166 TERM5.2 ; R*2.2 C9.2@1697.02,1147.78
MCU_3: C10.2 R*3.2 TERM3.5 TERM5.3 | length 3480.5
  TOP w25: TERM3.5 1461.4,1861 1606,1861 1660,1807 1660,1738 1808,1590 2081,1590 2253,1418 2648,1418 2720,1346 2720,1263 2678,1221 C10.2@2678,1149.83 ; R*3.2 C10.2@2679.76,1147.94 ; C10.2 2746,1148 2801,1093 2801,920 3135,586 3447,586 3634.3,398.7 TERM5.3
MCU_4: C11.2 R*4.2 TERM3.7 TERM5.4 | length 4151.4
  TOP w25: TERM3.7 1855.1,1861 1990,1861 2062,1789 2062,1730 2096,1696 2160,1696 2293,1563 3460,1563 3651,1372 3651,1235.18 3630.11,1214.29 C11.2@3630.11,1148 ; TERM5.4 3560.45,118 3796,118 3910,232 3910,954 3716,1148 C11.2@3630.11,1148 ; R*4.2 C11.2@3630.11,1148
MCU_5: C12.2 R*5.2 TERM3.9 TERM5.5 | length 5552.8
  TOP w25: TERM5.5 3406.6,75 4217,75 4867,725 4867,1063 4786,1144 C12.2 ; R*5.2 C12.2@4653.74,1143.5
  BOTTOM w25: TERM3.9 2152.8,1340.8 1898,1086 1898,503 2273,128 3127.6,128 TERM5.5
MCU_6: C25.2 R*6.2 TERM3.11 TERM5.6 | length 7114.6
  TOP w25: TERM3.11 2613.5,1832 2816.82,1832 2834.32,1814.5 2834.5,1814.5 v1(2957,1692) ; TERM5.6 3244.75,40 5487,40 5567,120 5567,353 5848,634 5848,1087 5790.31,1144.69 C25.2 ; R*6.2 C25.2@5688.74,1144.62
  BOTTOM w25: v1(2957,1692) 2874,1609 2874,834.65 2655.35,616 2413,616 2348,551 2348,210 2386,172 2974.75,172 TERM5.6
MCU_7: C26.2 R*7.2 TERM4.1 TERM5.7 | length 5231.9
  TOP w25: v1(2452.19,342) 2745.9,342 TERM5.7
  BOTTOM w25: v1(2452.19,342) 2929,818.81 2929,1491 TERM4.1 ; TERM5.7 3002.9,397 3920,397 3987,464 4383,464 4551,632 4853,632 4958,737 4958,1035 5068,1145 C26.2 ; R*7.2 C26.2@5263.74,1144.94
MCU_8: C27.2 R*8.2 TERM4.3 TERM5.8 | length 3416.1
  TOP w25: TERM4.3 3671.7,1840 4212,1840 4261,1791 4261,1369 v1(4225.13,1333.13)
  BOTTOM w25: TERM5.8 2743,241 3011,509 3510.18,509 4146.55,1145.38 C27.2 v1(4225.13,1333.13) ; R*8.2 C27.2@4225.2,1145.32
MCU_9: C28.2 R*9.2 TERM4.5 TERM5.9 | length 2745.6
  TOP w25: v1@3990.4,1430.6 TERM4.5
  BOTTOM w25: TERM5.9 2978.5,766.3 2978.5,1061.5 3065.6,1148.6 C28.2 3199.57,1342.57 3286,1429 v1(3992,1429) ; R*9.2 C28.2@3199.35,1148.38
MCU_10: C40.2 R*10.2 TERM4.7 TERM5.10 | length 4326.8
  TOP w25: v1(2903,1869) 3022,1750 v1(3022,1749)
  BOTTOM w25: R*10.2 C40.2@2224.23,1146.94 ; TERM5.10 1970.5,526.85 1970.5,1058.5 2059,1147 C40.2 2224.17,1548.17 2570,1894 2878,1894 v1(2903,1869) ; v1(3022,1749) 3022,1758 3110,1846 3261,1846 3311,1796 3311,1721 3348,1684 3619,1684 3764,1829 4320.1,1829 TERM4.7
MCU_11: C41.2 R*11.2 TERM4.9 TERM5.11 | length 8271.1
  BOTTOM w25: C41.2 1167.4,1156.4 1063,1052 1063,281 1218,126 1511,126 1717,332 1968.5,332 TERM5.11 2210.5,90 5217,90 5910,783 5910,1199 5506,1603 4939.8,1603 TERM4.9 ; R*11.2 C41.2@1257.51,1156.34
MCU_12: C42.2 R*12.2 TERM4.11 TERM5.12 | length 8742.4
  BOTTOM w25: C42.2 226.4,1161.4 172,1107 172,593 395,370 876,370 1195,51 1672.65,51 TERM5.12 2052.65,51 5271,51 5963,743 5963,1241.6 5537.6,1667 5269.5,1667 TERM4.11 ; R*12.2 C42.2@319.51,1161.34
NetD1_1: D1.1 R1.1 | length 84.3
  TOP w25: R1.1 D1.1
VCC: R1.2 R2.2 R3.2 R6.2 R7.2 R8.2 R9.2 R10.2 R11.2 R12.2 R13.2 R22.2 R23.2 R24.2 R25.2 R26.2 R27.2 R28.2 R29.2 R38.2 R39.2 R40.2 R41.2 R42.2 R43.2 TERM1.1 | length 10699.9
  TOP w25: R2.2@701.65,881.28 R3.2 856,815.2 v1@856,688 ; v1@1164,650 1215,599 1705,599 1777,671 1777,843 1752,868 R6.2 R7.2 ; v1(2018,956.4) 2018,691 2243,466 2954,466 3034,546 3034,603 v1(3032.54,604.46) 2764,873 R8.2 R9.2 ; R11.2 3684.09,959.6 3775,868.69 v1@3775,672.28 ; v1@4034,672 4136,570 4620,570 4761,711 4761,813 4711,863 R12.2 R13.2 ; R1.2 4826.63,531.54 v1(4868,572.91) ; R22.2 R23.2
  BOTTOM w25: R43.2 R42.2 276.4,884.4 244,852 244,613.96 407.96,450 737,450 856,569 v1@856,688 ; v1(1162.54,651.46) 1162.54,842.54 1200,880 R40.2 R41.2@1256.63,968.28 ; v1@2019.6,958 R39.2 R38.2 ; v1(3034,455) 3554.8,455 v1(3773.54,673.74) ; v1@3034,603 3034,881 3114,961 3195.8,961 R29.2 R28.2 ; v1@4032.26,673.74 v1(3773.54,673.74) ; R26.2 R27.2 4059.35,959.54 v1(3773.54,673.74) ; v1(4618.54,571.46) 4869.46,571.46 5016,718 5016,867 5104.94,955.94 R25.2 R24.2
  other v1: 4032.54,673.46 854.54,689.46
pads on no net: FID1.1 FID2.1 FID3.1 FID4.1 FID5.1 FID6.1

## Polygon pours and split planes (outlines as drawn)
GND on BOTTOM "GND_BOTTOM" (solid, remove dead copper, pour order 0): 0,0 0,2000 6000,2000 6000,0
VCC on TOP "VCC_TOP" (solid, remove dead copper, pour order 1): 0,0 0,2000 6000,2000 6000,0

## Silkscreen, mask and mechanical layers (free items; w line width, h text height)
Top Overlay:
  lines w10: 875,1455 875,1469 ; 875,1485.55 875,1499.55 ; 875,1515.55 875,1529.55 ; 875,1545.55 875,1559.55 ; 875,1576.55 875,1590.55 ; 1275,1455 1275,1469 ; 1275,1485.55 1275,1499.55 ; 1275,1515.55 1275,1529.55 ; 1275,1545.55 1275,1559.55 ; 1275,1576.55 1275,1590.55 ; 1675,1455 1675,1469 ; 1675,1485.55 1675,1499.55 ; 1675,1515.55 1675,1529.55 ; 1675,1545.55 1675,1559.55 ; 1675,1576.55 1675,1590.55 ; 2062,1455 2062,1469 ; 2062,1485.55 2062,1499.55 ; 2062,1515.55 2062,1529.55 ; 2062,1545.55 2062,1559.55 ; 2062,1576.55 2062,1590.55 ; 2455,1455 2455,1469 ; 2455,1485.55 2455,1499.55 ; 2455,1515.55 2455,1529.55 ; 2455,1545.55 2455,1559.55 ; 2455,1576.55 2455,1590.55 ; 3500,1455 3500,1469 ; 3500,1485.55 3500,1499.55 ; 3500,1515.55 3500,1529.55 ; 3500,1545.55 3500,1559.55 ; 3500,1576.55 3500,1590.55 ; 3900,1455 3900,1469 ; 3900,1485.55 3900,1499.55 ; 3900,1515.55 3900,1529.55 ; 3900,1545.55 3900,1559.55 ; 3900,1576.55 3900,1590.55 ; 4295,1455 4295,1469 ; 4295,1485.55 4295,1499.55 ; 4295,1515.55 4295,1529.55 ; 4295,1545.55 4295,1559.55 ; 4295,1576.55 4295,1590.55 ; 4685,1455 4685,1469 ; 4685,1485.55 4685,1499.55 ; 4685,1515.55 4685,1529.55 ; 4685,1545.55 4685,1559.55 ; 4685,1576.55 4685,1590.55 ; 5085,1455 5085,1469 ; 5085,1485.55 5085,1499.55 ; 5085,1515.55 5085,1529.55 ; 5085,1545.55 5085,1559.55 ; 5085,1576.55 5085,1590.55 ; 163,558 163,1437 831,1437 831,558 163,558 ; 1134.37,554 1841.37,554 1841.37,1435 1134.37,1435 1134.37,554 ; 2111.09,557 2817.09,557 2817.09,1434 2111.09,1434 2111.09,557 ; 3050.74,550 3772.74,550 3772.74,1433.25 3050.74,1433.25 3050.74,550 ; 4083.37,547 4797.37,547 4797.37,1433.25 4083.37,1433.25 4083.37,547 ; 4765,153 5131,153 5131,353 4765,353 4765,153 ; 5113.37,544.69 5113.37,1433 5833.37,1433 5833.37,544.69 5113.37,544.69
  text "L1" at 815,1540 h30
  text "L2" at 895,1540 h30
  text "L10" at 4590,1540 h30
  text "L11" at 5005,1540 h30
  text "L12" at 5105,1540 h30
  text "L8" at 3830.53,1539.45 h30
  text "L9" at 3920.53,1539.45 h30
  text "L9" at 4225.53,1539 h30
  text "L10" at 4315.53,1539 h30
  text "L11" at 4705,1539.45 h30
  text "L2" at 1205,1534.45 h30
  text "L3" at 1295,1534.45 h30
  text "L3" at 1605,1534.45 h30
  text "L4" at 1695,1534.45 h30
  text "L4" at 1995,1534.45 h30
  text "L5" at 2085,1534.45 h30
  text "L5" at 2387.68,1534.45 h30
  text "L6" at 2477.68,1534.45 h30
  text "L7" at 3430.53,1534.45 h30
  text "L8" at 3520.53,1534.45 h30
  text "#1" at 175,1390 h30
  text "#3" at 2128.39,1390 h30
  text "#5" at 4095,1390 h30
  text "#4" at 3065,1387.43 h30
  text "#6" at 5127.37,1387.43 h30
  text "#2" at 1155,1385 h30
  text "GND" at 575,456 h30
  text "VCC" at 774.85,455 h30
  text "GND" at 1195,455 h30
  text "GND" at 1395,455 h30
  text "MCU CONNECTIONS" at 1743,437 h30
  text "Power LED" at 4760,368 h30
Bottom Overlay:
  lines w10: 150.88,572.4 150.88,1435 932.88,1435 932.88,572.4 150.88,572.4 ; 1107,558.4 1107,1421 1855.88,1421 1855.88,558.4 1107,558.4 ; 2061.6,557.4 2061.6,1412 2848.6,1412 2848.6,557.4 2061.6,557.4 ; 3060,554 3060,1412 3772,1412 3772,554 3060,554 ; 4081.57,550 4081.57,1412 4793.57,1412 4793.57,550 4081.57,550 ; 5122.11,544.4 5122.11,1412 5830.11,1412 5830.11,544.4 5122.11,544.4
  text "#12" at 915,1390 h30
  text "#11" at 1839.88,1374 h30
  text "#10" at 2833,1365 h30
  text "#9" at 3755,1365 h30
  text "#8" at 4777.8,1365 h30
  text "#7" at 5815,1365 h30
Mechanical 4:
  lines w10: 0,0 0,1500 1500,1500 1500,0 0,0
Mechanical 8:
  the board outline again, w25
Drill Drawing:
  circle w10: c6225.62,-279.17 r33.33
  lines w10: 6192.29,-612.5 6258.96,-612.5 6258.96,-545.83 6192.29,-545.83 6192.29,-612.5 ; 6192.29,-445.83 6208.96,-445.83 6208.96,-462.5 6242.29,-462.5 6242.29,-445.83 6258.96,-445.83 6258.96,-412.5 6242.29,-412.5 6242.29,-395.83 6208.96,-395.83 6208.96,-412.5 6192.29,-412.5 6192.29,-445.83
  lines w15: 6132.5,-657.5 12172.88,-657.5 ; 6132.5,-207.5 12172.88,-207.5 ; 6683.38,-807.5 6683.38,-57.5 ; 7223.24,-807.5 7223.24,-57.5 ; 8362.9,-807.5 8362.9,-57.5 ; 8868.78,-807.5 8868.78,-57.5 ; 9602.58,-807.5 9602.58,-57.5 ; 10792.24,-807.5 10792.24,-57.5 ; 11382.08,-807.5 11382.08,-57.5 ; 6132.5,-807.5 12172.88,-807.5 12172.88,-57.5 6132.5,-57.5 6132.5,-807.5
  lines w25: 6138.65,1703.07 13219.79,1703.07 ; 6145.5,534.68 13215.09,534.68 ; 6145.85,1141.31 13212.74,1141.31 ; 8755.42,548.79 8755.42,1141.31 ; 8755.42,1708.79 8755.42,2262 ; 9775.42,1148.21 9775.42,1701.42 ; 10846.42,539.27 10846.42,1131.79 ; 6137,12 6137,2262 13220.69,2262 13220.69,12 6137,12
  text "FABRICATION NOTES: /  / 01. BOARD THICKNESS IS 0.062 IN. +/- 10% / 02. WARP & TWIST SHALL NOT EXCEED 1% / 03. ENIG FINISH / 04. SOLDERMASK SHALL BE BLUE LOW GLOSS WITH WHITE EPOXY SILKSCREEN / 05. ROHS LOGO SHALL BE PLACED IN SILK ON BOTTOM / 06. LEAD FREE LOGO TO BE PLACED IN SILK ON BOTTOM / 07. FAB HOUSE TO UPDATE SILKSCREEN FOR MANUFACTURE DATE / 08. FAB HOUSE TO INCREMENT SERIAL NUMBER IN SILK, STARTING AT 00, FOR EACH BOARD / 09. SMALLEST TRACE IS 25 MIL / 10. SMALLEST DRILL IS 28 MIL / 11. COPPER WEIGHT IS 2 OZ. INNER & OUTER / 12. 100% ELECTRICAL TEST FOR OPENS & SHORTS / 13. FINAL FINISH WILL HAVE NO NICKS OR CHIPS IN SOLDERMASK" at 6132,2361 h100
  text "Object Detection Circuit" at 10457,1912 h100
  text "Project Name:" at 8865.89,1908.01 h100
  text "Project #:" at 6301.1,1905.34 h100
  text "ARS" at 7507,1902 h100
  text "Company: N/A" at 10023.42,1355.79 h100
  text "Nathan A. Schram" at 7527,1352 h100
  text "Designer:" at 6310.04,1342.34 h100
  text "Cage Code:" at 11302.93,775.33 h100
  text "N/A" at 12434.42,765.83 h100
  text "Date:" at 8995.43,758.29 h100
  text "REV #:" at 6323.93,747.87 h100
  text "0.2" at 7035.42,747.6 h100
  text "2018-MAR-31" at 9537,747.87 h100
  text "Notes:" at 6320.23,269.88 h100
  text "Symbol" at 6222.5,-162.5 h72
  text "Count" at 6728.38,-162.5 h72
  text "Hole Size" at 7268.24,-162.5 h72
  text "Plated" at 8407.9,-162.5 h72
  text "Hole Type" at 8913.78,-162.5 h72
  text "Drill Layer Pair" at 9647.58,-162.5 h72
  text "Via/Pad" at 10837.24,-162.5 h72
  text "Pad Shape" at 11427.08,-162.5 h72
  text "4" at 6728.38,-312.5 h60
  text "150.00mil (3.810mm)" at 7268.24,-312.5 h60
  text "PTH" at 8407.9,-312.5 h60
  text "Round" at 8913.78,-312.5 h60
  text "TOP - BOTTOM" at 9647.58,-312.5 h60
  text "Pad" at 10837.24,-312.5 h60
  text "Rounded" at 11427.08,-312.5 h60
  text "40" at 6728.38,-462.5 h60
  text "55.12mil (1.400mm)" at 7268.24,-462.5 h60
  text "PTH" at 8407.9,-462.5 h60
  text "Round" at 8913.78,-462.5 h60
  text "TOP - BOTTOM" at 9647.58,-462.5 h60
  text "Pad" at 10837.24,-462.5 h60
  text "(Mixed)" at 11427.08,-462.5 h60
  text "43" at 6728.38,-612.5 h60
  text "28.00mil (0.711mm)" at 7268.24,-612.5 h60
  text "PTH" at 8407.9,-612.5 h60
  text "Round" at 8913.78,-612.5 h60
  text "TOP - BOTTOM" at 9647.58,-612.5 h60
  text "Via" at 10837.24,-612.5 h60
  text "Rounded" at 11427.08,-612.5 h60
  text "87 Total" at 6728.38,-762.5 h60

## Dimensions
0,0 to 6000,0 on Drill Drawing
0,2000 to 0,0 on Drill Drawing
250,250 to 5750,250 on Drill Drawing
250,1750 to 250,250 on Drill Drawing

## Text inside footprints (layer, text, board x,y; h text height)
Q1: Top Overlay "C" at 379.28,1012.6 h30 r90; Top Overlay "E" at 542.28,1056.6 h30 r90; Top Overlay "B" at 542.28,863.6 h30 r90
Q2: Top Overlay "C" at 1367.65,1002.6 h30 r90; Top Overlay "E" at 1530.65,1046.6 h30 r90; Top Overlay "B" at 1530.65,853.6 h30 r90
Q3: Top Overlay "C" at 2355.68,1004.6 h30 r90; Top Overlay "E" at 2518.68,1048.6 h30 r90; Top Overlay "B" at 2518.68,855.6 h30 r90
Q4: Top Overlay "C" at 3283.02,1002.6 h30 r90; Top Overlay "E" at 3446.02,1046.6 h30 r90; Top Overlay "B" at 3446.02,853.6 h30 r90
Q5: Top Overlay "C" at 4311.96,999.69 h30 r90; Top Overlay "E" at 4474.96,1043.69 h30 r90; Top Overlay "B" at 4474.96,850.69 h30 r90
Q6: Top Overlay "C" at 5347.65,997.28 h30 r90; Top Overlay "E" at 5510.65,1041.28 h30 r90; Top Overlay "B" at 5510.65,848.28 h30 r90
Q7: Bottom Overlay "C" at 5594.83,999 h30 r270; Bottom Overlay "E" at 5431.83,1043 h30 r270; Bottom Overlay "B" at 5431.83,850 h30 r270
Q8: Bottom Overlay "C" at 4563.28,1002.6 h30 r270; Bottom Overlay "E" at 4400.28,1046.6 h30 r270; Bottom Overlay "B" at 4400.28,853.6 h30 r270
Q9: Bottom Overlay "C" at 3534.72,1007.6 h30 r270; Bottom Overlay "E" at 3371.72,1051.6 h30 r270; Bottom Overlay "B" at 3371.72,858.6 h30 r270
Q10: Bottom Overlay "C" at 2559.31,1001 h30 r270; Bottom Overlay "E" at 2396.31,1045 h30 r270; Bottom Overlay "B" at 2396.31,852 h30 r270
Q11: Bottom Overlay "C" at 1594.88,1010.4 h30 r270; Bottom Overlay "E" at 1431.88,1054.4 h30 r270; Bottom Overlay "B" at 1431.88,861.4 h30 r270
Q12: Bottom Overlay "C" at 649.88,1016.4 h30 r270; Bottom Overlay "E" at 486.88,1060.4 h30 r270; Bottom Overlay "B" at 486.88,867.4 h30 r270
TERM1: Top Overlay "2" at 460,232 h30; Top Overlay "1" at 945,232 h30; Mechanical 2 "Terminal Opening" at 255.87,-53.15 h60
TERM2: Top Overlay "2" at 1083.38,232 h30; Top Overlay "1" at 1573.38,232 h30; Mechanical 2 "Terminal Opening" at 880.87,-53.15 h60
TERM3: Top Overlay "12" at 2883.72,1760.72 h30; Top Overlay "1" at 426,1758 h30; Mechanical 2 "Terminal Opening" at 2141.98,1913.62 h60 r180
TERM4: Top Overlay "12" at 5512,1763 h30; Top Overlay "1" at 3029,1819 h30; Mechanical 2 "Terminal Opening" at 4766.98,1913.62 h60 r180
TERM5: Top Overlay "12" at 1657,214 h30; Top Overlay "1" at 4190,227 h30; Mechanical 2 "Terminal Opening" at 2464.02,92.38 h60